# Altium PCB LM331vs6N137.PcbDoc
Units mil, origin at the board's own origin, x right, y up, seen from the top; angles counter-clockwise.
Board outline 2952.76 x 984.25 mil, 2 copper layers (Top Layer, Bottom Layer); 21 components, 17 nets, 118 pads, 1 vias.
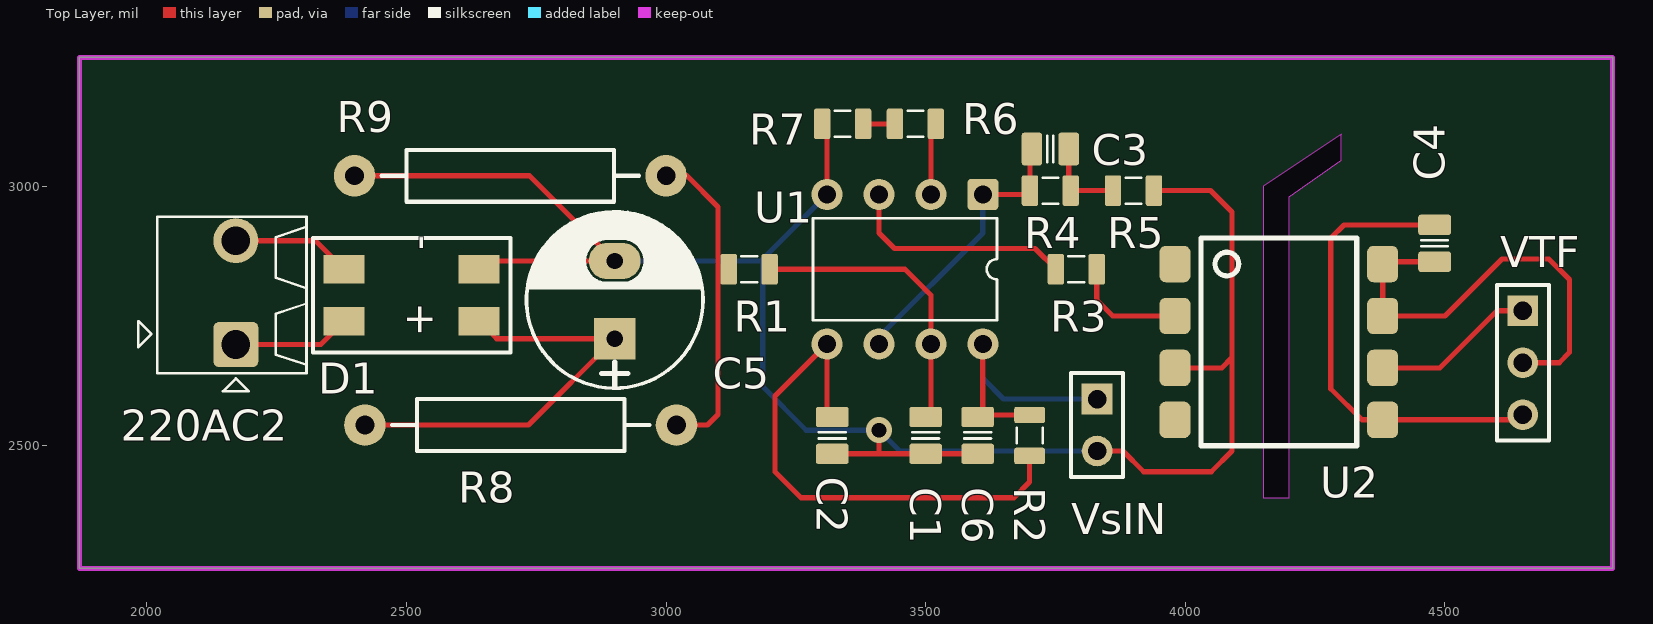
[diagram p0: Top Layer view]
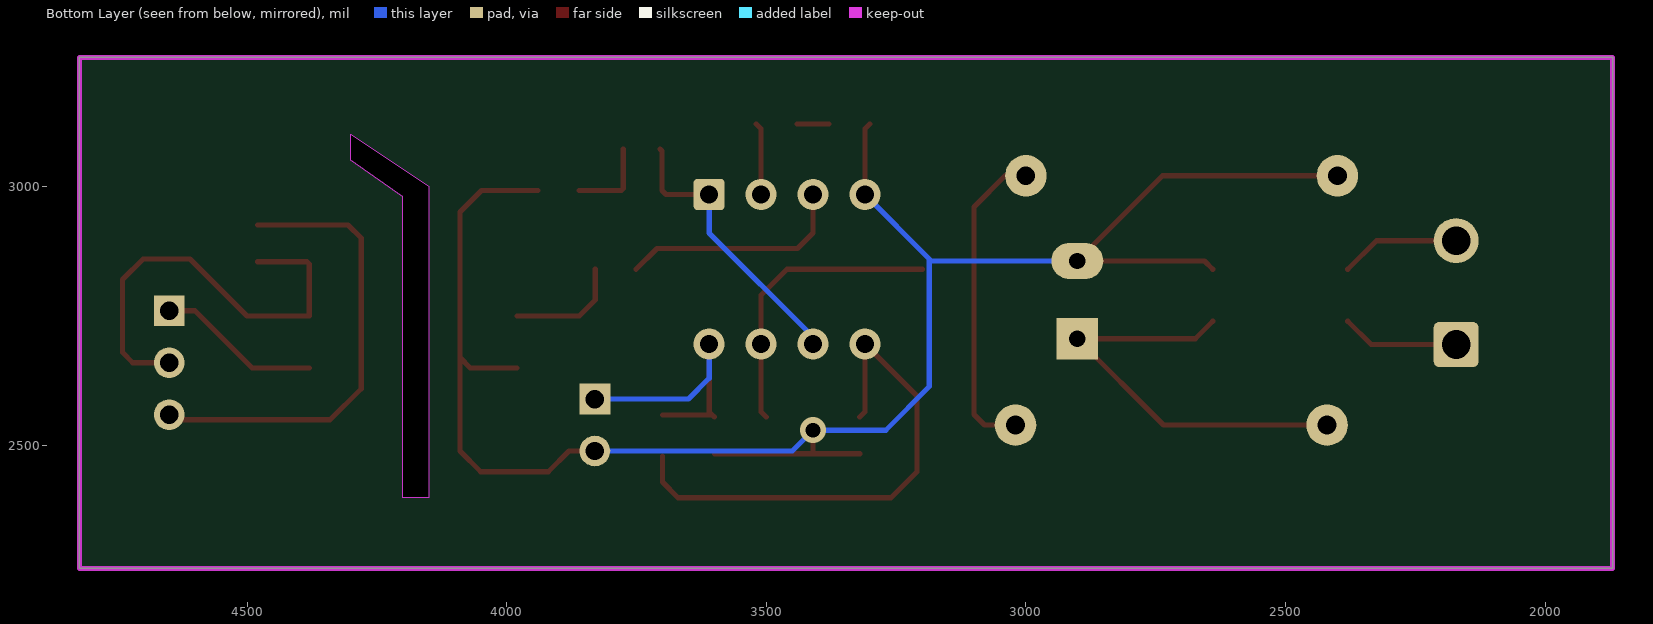
[diagram p1: Bottom Layer view, seen from below]
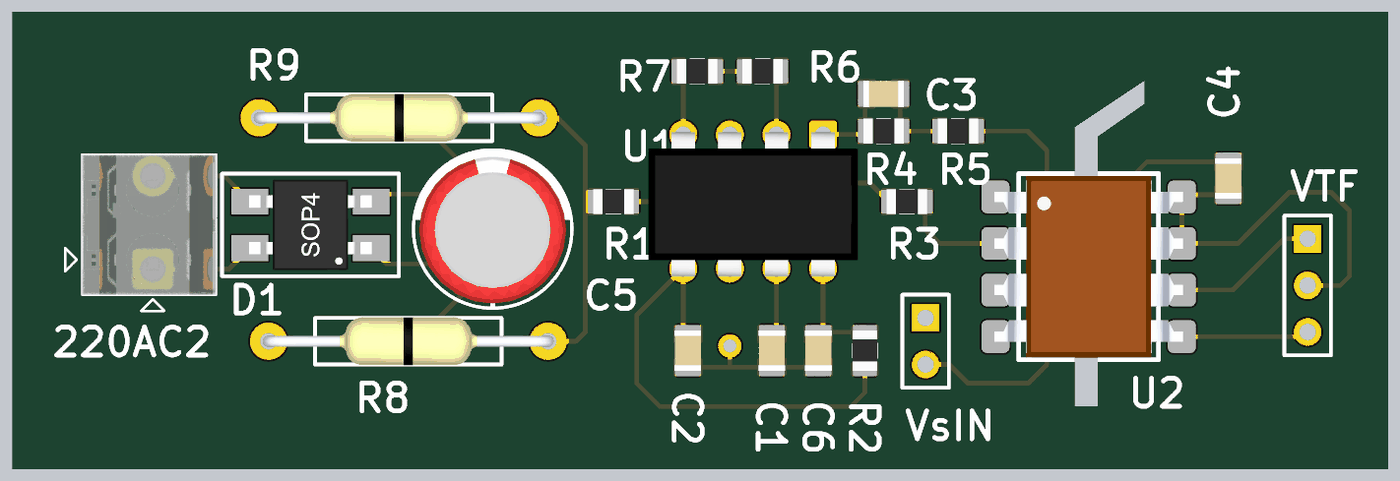
[diagram p2: 3D render of the assembled board from above, using the file's embedded part models]

## Layer stack, top to bottom
Top Solder: solder mask 0.4, Solder Resist, Dk 3.5
Top Layer: signal copper 1.4
Dielectric 1: dielectric 12.6, FR-4, Dk 4.8
Bottom Layer: signal copper 1.4
Bottom Solder: solder mask 0.4, Solder Resist, Dk 3.5

## Board outline
1870.08,2263.78 4822.83,2263.78 4822.83,3248.03 1870.08,3248.03
cut-out: 4300,3100 4150,3000 4150,2400 4200,2400 4200,2980 4300,3050

## Design rules (kind name [scope] priority, off if disabled: settings)
Clearance [All] p1: gap=25
PolygonConnect [All] p1: connectstyle=Relief reliefconductorwidth=10 reliefentries=4 polygonreliefangle="90 Angle" airgapwidth=10
RoutingVias [All] p1: holewidth=28 width=50 viastyle="Through Hole" minholewidth=28 minwidth=50 maxholewidth=28 maxwidth=50
SolderMaskExpansion [All] p1: expansion=4
Width [All] p1: maxlimit=10 minlimit=10 preferedwidth=10
30 further rules are at their usual default settings.

## Components (designator, comment, footprint, x,y, rotation, side; value= is the part's Value field where it differs from the comment)
220AC2 "Stackable ScrewTerm" 2P_PCB_ScrewTerm_200mil 2020,2640 r0 top
C1 "CAP NP" CAPC2012N_F 3500,2520 r90 top
C2 "CAP NP" CAPC2012N_F 3320,2520 r90 top
C3 "CAP NP" CAPC2012N_F 3740,3071.5 r0 top
C4 "CAP NP" CAPC2012N_F 4480,2890 r270 top
C5 "Cap" "CAP 3.8mm" 2900,2780 r90 top
C6 "CAP NP" CAPC2012N_F 3600,2520 r90 top
D1 "Bridge" MB6S 2700,2680 r90 top
R1 "Res" RESC2012N_F 3160,2840 r0 top
R2 "Res" RESC2012N_F 3700,2520 r270 top
R3 "Res" RESC2012N_F 3790,2840 r0 top
R4 "Res" RESC2012N_F 3740,2991.5 r180 top
R5 "Res" RESC2012N_F 3900,2991.5 r180 top
R6 "Res" RESC2012N_F 3480,3120 r0 top
R7 "Res" RESC2012N_F 3340,3120 r0 top
R8 "Res" RESTH_0.0R_AXIAL-0.6 2720,2540 r0 top
R9 "Res" RESTH_0.0R_AXIAL-0.6 2700,3020 r0 top
U1 "LM331" DIP8-300 3460,2840 r270 top
U2 "6N137" SMD-8 4080,2650 r270 top
VsIN "Header 2" HDR1X2 3830,2590 r270 top
VTF "Header 3" HDR1X3 4650,2760 r270 top

## Footprints (in the part's own frame and the unit in brackets; to place one, negate y for a bottom-side part, rotate by r counter-clockwise, add the part's x,y. Pads: shape width x height; smd on the part's side, far side on the other; paste and mask are expansions set on the pad)
2P_PCB_ScrewTerm_200mil [mm]
  rrect25% 2.2x2.2 hole 1.4: 1(3.85,1.397)
  round 2.2 hole 1.4: 2(3.85,6.477)
  silkscreen extent -0.93,-0.89 7.3,7.66, body extent 0,0 7.3,7.62, height 8.5
"CAP 3.8mm" [mil] "16V 470uF"
  rect 80x80 hole 31.5: 1(-74,-1)
  oval 70x100 hole 31.5: 2(76,-1)
  silkscreen extent -169,-171 171,169, body extent -159,-158 156,156, height 446
CAPC2012N_F [mm] "Chip Capacitor, Body 2.0x1.2mm, 0805, IPC Medium Density, for Flex circuits"
  round 0.254 on Mech14: 0(0,0)
  rrect25% 1.2x1.4 on Top Solder: 1(-0.9,0) 1(0.9,0)
  rrect25% 1x1.6 smd paste-1: 1(-0.9,0) 2(0.9,0)
  rrect25% 1x1.4 on Top Paste: 1(-0.9,0) 1(0.9,0)
  Top Layer pour cut-out: -0.4,0.8 0.4,0.8 0.4,-0.8 -0.4,-0.8
  silkscreen extent -0.15,-0.65 0.15,0.65, body extent -1.1,-0.72 1.1,0.73, height 1.34
DIP8-300 [mil] "DIP, 8-Leads, 0.300\" lead span , 0.100\" lead pitch, IPC Density A"
  round 39.37 on Mech14: 0(0,0)
  rrect25% 60x60 hole 35: 1(-144,150)
  round 60 hole 35: 2(-144,50) 3(-144,-50) 4(-144,-150) 5(144,-150) 6(144,-50) 7(144,50) 8(144,150)
  silkscreen extent -98,-177 98,177, body extent -149,-225 161,225, height 165
HDR1X2 [mm] "Connector; Header; 2 Position"
  rect 1.5x1.5 hole 0.9: 1(0,0)
  round 1.5 hole 0.9: 2(2.54,0)
  silkscreen extent -1.27,-1.27 3.81,1.27, body extent -1.27,-1.27 3.81,1.27, height 7
HDR1X3 [mm] "Connector; Header; 3 Position"
  rect 1.5x1.5 hole 0.9: 1(0,0)
  round 1.5 hole 0.9: 2(2.54,0) 3(5.08,0)
  silkscreen extent -1.27,-1.27 6.35,1.27, body extent -1.27,-1.27 6.35,1.27, height 7
MB6S [mil] "Surface mount diode bridge"
  rect 55.12x78.74 smd: 1(60,60) 2(60,320) 3(160,320) 4(160,60)
  silkscreen extent 0,0 220,380, body extent 13,58 207,322, height 114
RESC2012N_F [mm] "Chip Resistor, Body 2.0x1.2mm, 0805, IPC Medium Density"
  round 0.254 on Mech14: 0(0,0)
  rrect25% 1x1.3 on Top Solder: 1(-1,0) 1(1,0)
  rrect25% 0.8x1.5 smd paste-1: 1(-1,0) 2(1,0)
  rrect25% 0.8x1.3 on Top Paste: 1(-1,0) 1(1,0)
  Top Layer pour cut-out: -0.6,0.75 0.6,0.75 0.6,-0.75 -0.6,-0.75
  silkscreen extent -0.38,-0.64 0.38,0.64, body extent -1.1,-0.67 1.1,0.68, height 0.69
RESTH_0.0R_AXIAL-0.6 [mil] "Axial Resistor 0 Ohm, Thru-Hole; 2 Leads; 0.6 in Pin Spacing"
  round 80 hole 36: 1(-300,0) 2(300,0)
  silkscreen extent -248,-50 248,50, body extent -312,-52 312,52, height 103
SMD-8 [mm] "6N137"
  rrect40% 1.78x1.52 smd: 1(-5.08,-2.54) 2(-2.54,-2.54) 3(0,-2.54) 4(2.54,-2.54) 5(2.54,7.62) 6(0,7.62) 7(-2.54,7.62) 8(-5.08,7.62)
  silkscreen extent -6.35,-1.27 3.81,6.35, body extent -6.22,-2.61 3.69,7.69, height 5.09

## Part data
220AC2: library part 2P_ScrewTerm_90S_3.81MM, "Terminal Block Screw Type THT 2-Position 3.81mm pitch"
D1: library part Bridge1, "Full Wave Diode Bridge"
VsIN: "Header, 2-Pin"
VTF: "Header, 3-Pin"

## Via types
v1: diameter 50, hole 28, Top Layer to Bottom Layer, 1 vias

## Nets (pads, with @x,y where several pads share a name; then routed paths per layer and width w, separated by ;. In a path a pad name is that pad's centre, name@x,y a point inside that pad or via, vN(x,y) a via of type N, cw(c..) or ccw(c..) an arc to the next point about the centre after c; other vN are vias at no path point)
CMIN: C1.2 R1.2 U1.7 | length 570
  Top Layer w10: R1.2 3460,2840 3510,2790 U1.7 3510,2565.43 C1.2
F_ISO_OUT: U2.6 VTF.1 | length 315.6
  Top Layer w10: U2.6 4490,2650 4600,2760 VTF.1
FOUT: R3.1@3750.63,2840 U1.3 | length 443.6
  Top Layer w10: U1.3 3410,2910 3440,2880 3710.63,2880 R3.1@3750.63,2840
GND: C1.1@3500,2484.57 C2.1@3320,2484.57 C5.2 C6.1@3600,2484.57 D1.4 R5.1@3939.37,2991.5 R7.1@3300.63,3120 R9.1 U1.4 U2.3 VsIN.2 | length 3744.5
  Top Layer w10: R9.1 2737,3020 C5.2 2656,2856 D1.4 ; R7.1@3300.63,3120 3310,3110.63 U1.4 ; C2.1@3320,2484.57 3410,2484.57 ; v1(3410,2530) 3410,2484.57 ; C6.1@3600,2484.57 3500,2484.57 3410,2484.57 ; VsIN.2 3880,2490 3920,2450 4050,2450 4090,2490 4090,2670 ; R5.1@3939.37,2991.5 4048.5,2991.5 4090,2950 4090,2670 ; U2.3 4070,2650 4090,2670
  Bottom Layer w10: C5.2 3182,2856 3186,2860 ; U1.4 3186,2860 ; VsIN.2 3450,2490 v1(3410,2530) 3270,2530 3186,2614 3186,2860
GND2: C4.1@4480,2925.43 U2.5 VTF.3 | length 899.5
  Top Layer w10: C4.1@4480,2925.43 4305.43,2925.43 4280,2900 4280,2610 4340,2550 U2.5 4640,2550 VTF.3
Net220AC2_1: 220AC2.1 D1.2 | length 227.1
  Top Layer w10: 220AC2.1 2335,2695 D1.2
Net220AC2_2: 220AC2.2 D1.3 | length 231.2
  Top Layer w10: 220AC2.2 2325,2895 D1.3
NetC3_2: C3.2 R4.1@3779.37,2991.5 R5.2 | length 162.9
  Top Layer w10: C3.2 3775.43,2995.43 3779.37,2991.5 R5.2
NetC5_1: C5.1 D1.1 R8.1 | length 824.8
  Top Layer w10: R8.1 2735,2540 C5.1 2674,2706 D1.1
NetR3_2: R3.2 U2.2 | length 222.7
  Top Layer w10: R3.2 3829.37,2780.63 3860,2750 U2.2
NetR6_1: R6.1@3440.63,3120 R7.2 | length 61.3
  Top Layer w10: R7.2 R6.1@3440.63,3120
RC: C2.2 R2.2 U1.5 | length 1005.9
  Top Layer w10: C2.2 3310,2565.43 U1.5 3210,2596 3210,2450 3260,2400 3670,2400 3700,2430 R2.2
REFI: R6.2 U1.2 | length 139.9
  Top Layer w10: U1.2 3510,3110.63 R6.2
THR: C3.1@3704.57,3071.5 R4.2 U1.1 U1.6 | length 546.2
  Top Layer w10: U1.1 3693.13,2984 R4.2 3700.63,3067.56 C3.1@3704.57,3071.5
  Bottom Layer w10: U1.6 3410,2710 3610,2910 U1.1
VCC: C4.2 U2.7 U2.8 VTF.2 | length 862.3
  Top Layer w10: C4.2 4384.57,2854.57 U2.8 U2.7 4500,2750 4610,2860 4700,2860 4740,2820 4740,2680 4720,2660 VTF.2
VIN: R1.1@3120.63,2840 R8.2 R9.2 | length 613.1
  Top Layer w10: R9.2 3040,3020 3100,2960 3100,2560 3080,2540 R8.2
VS: C6.2 R2.1@3700,2559.37 U1.8 VsIN.1 | length 543.3
  Top Layer w10: C6.2 C6.2@3603.94,2559.37 ; U1.8 3610,2565.43 C6.2@3603.94,2559.37 ; R2.1@3700,2559.37 C6.2@3603.94,2559.37
  Bottom Layer w10: U1.8 3610,2630 3650,2590 VsIN.1
pads on no net: C1.0 C1.1@3500,2484.57 C1.1@3500,2555.43 C1.1@3500.01,2484.56 C1.1@3500.01,2555.43 C2.0 C2.1@3320,2484.57 C2.1@3320,2555.43 C2.1@3320.01,2484.56 C2.1@3320.01,2555.43 C3.0 C3.1@3704.56,3071.49 C3.1@3704.57,3071.5 C3.1@3775.43,3071.5 C3.1@3775.43,3071.49 C4.0 C4.1@4479.99,2854.57 C4.1@4479.99,2925.44 C4.1@4480,2854.57 C4.1@4480,2925.43 C6.0 C6.1@3600,2484.57 C6.1@3600,2555.43 C6.1@3600.01,2484.56 C6.1@3600.01,2555.43 R1.0 R1.1@3120.63,2839.99 R1.1@3120.63,2840 R1.1@3199.37,2839.99 R1.1@3199.37,2840 R2.0 R2.1@3699.99,2480.63 R2.1@3699.99,2559.37 R2.1@3700,2480.63 R2.1@3700,2559.37 R3.0 R3.1@3750.63,2839.99 R3.1@3750.63,2840 R3.1@3829.37,2839.99 R3.1@3829.37,2840 R4.0 R4.1@3700.63,2991.5 R4.1@3779.37,2991.5 R5.0 R5.1@3860.63,2991.5 R5.1@3939.37,2991.5 R6.0 R6.1@3440.63,3119.99 R6.1@3440.63,3120 R6.1@3519.37,3119.99 R6.1@3519.37,3120 R7.0 R7.1@3300.63,3119.99 R7.1@3300.63,3120 R7.1@3379.37,3119.99 R7.1@3379.37,3120 U1.0 U2.1 U2.4

## Keep-outs
Keep-Out Layer:
  the board outline again, w10

## Text inside footprints (layer, text, board x,y; h text height)
D1: Top Overlay "+    -" at 2570,2710 h98.43 r90